# Altium PCB bms_afe_tester-1_1.PcbDoc (part 1 of 6)
Units mm, origin at the board's own origin, x right, y up, seen from the top; angles counter-clockwise.
Board outline 410 x 67 mm, 4 copper layers (L1, L2, L3, L4), stack 1.586 mm thick; 598 components, 356 nets, 1901 pads, 1542 vias.
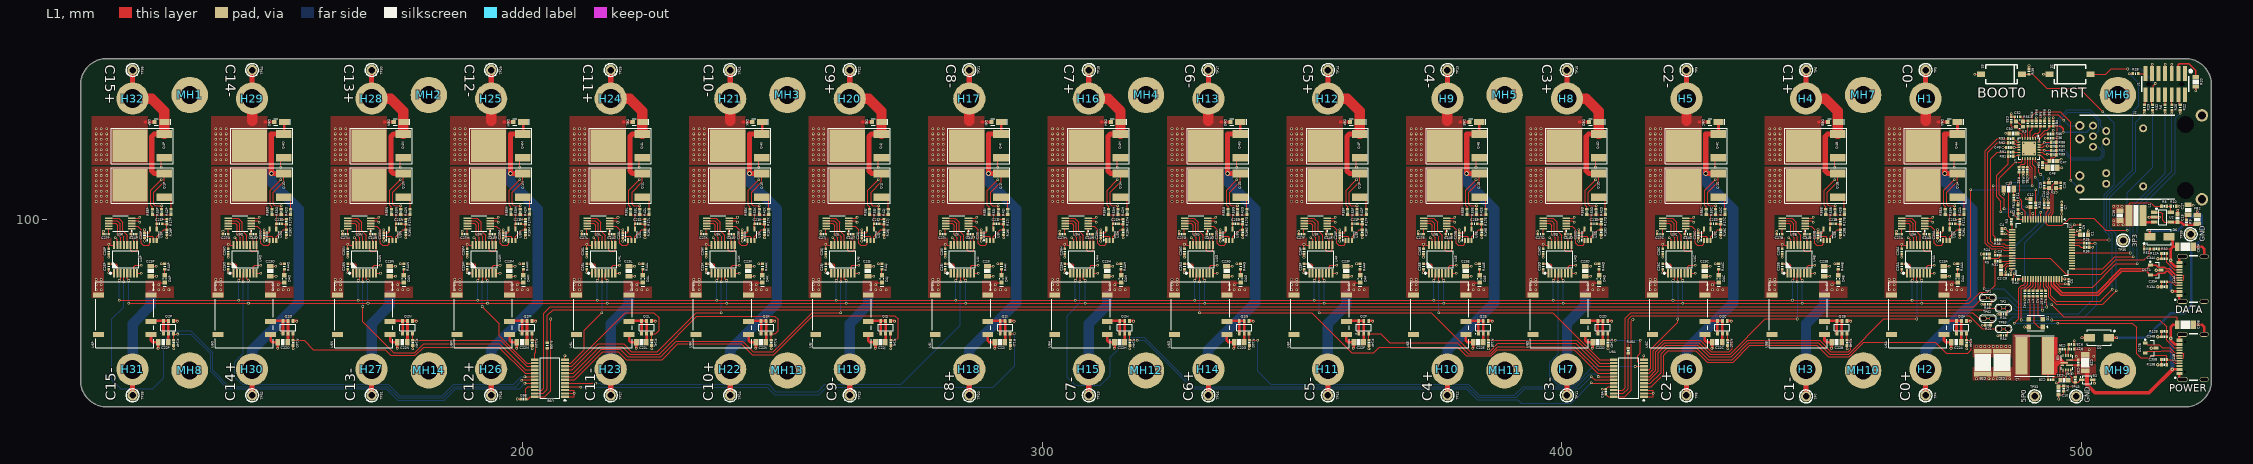
[diagram p0: L1 view]
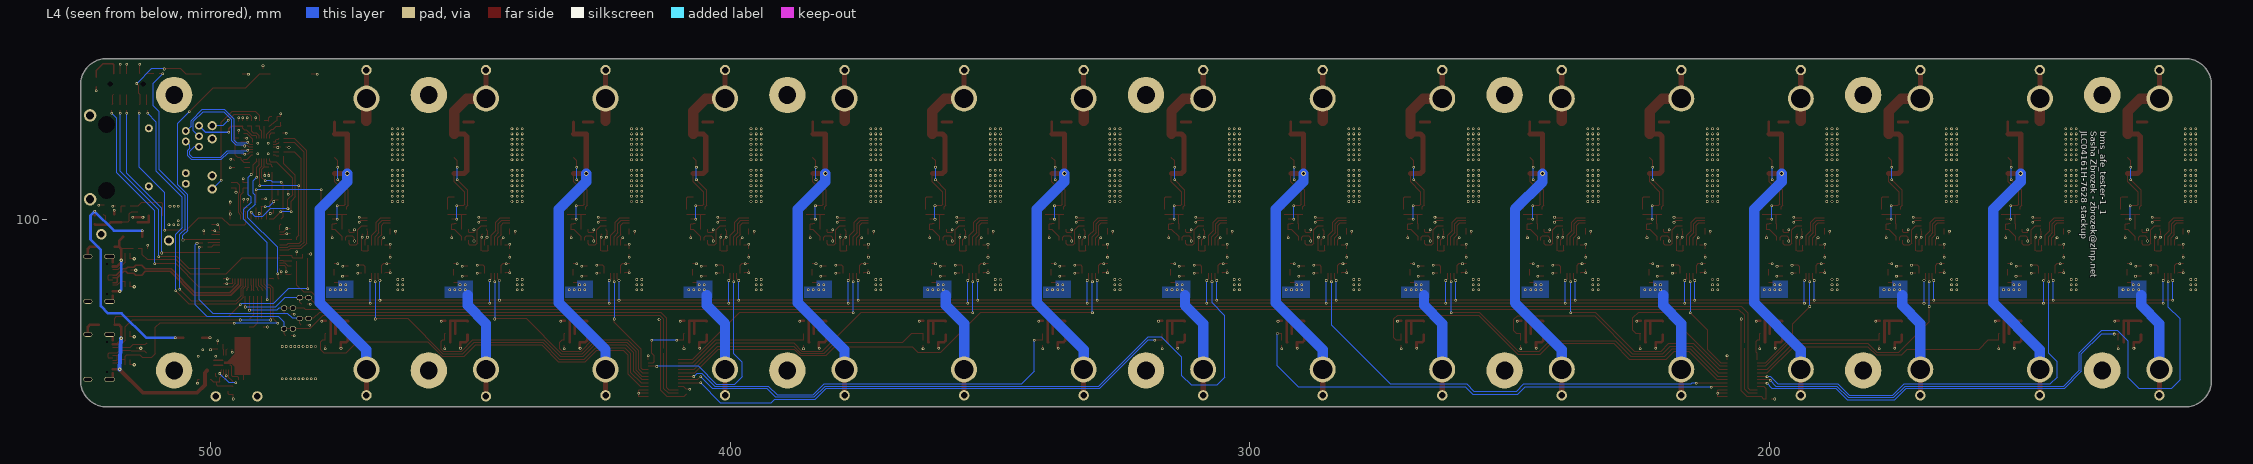
[diagram p1: L4 view, seen from below]
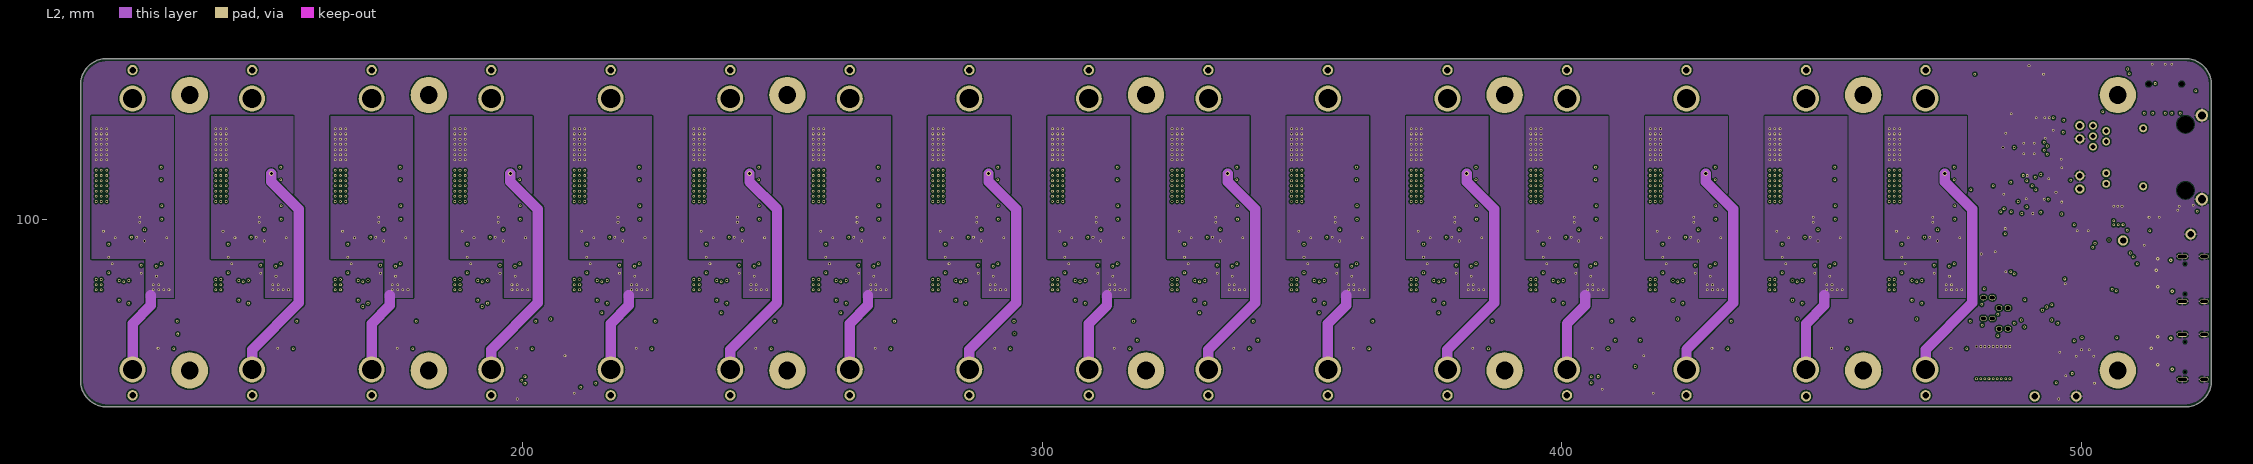
[diagram p2: L2]
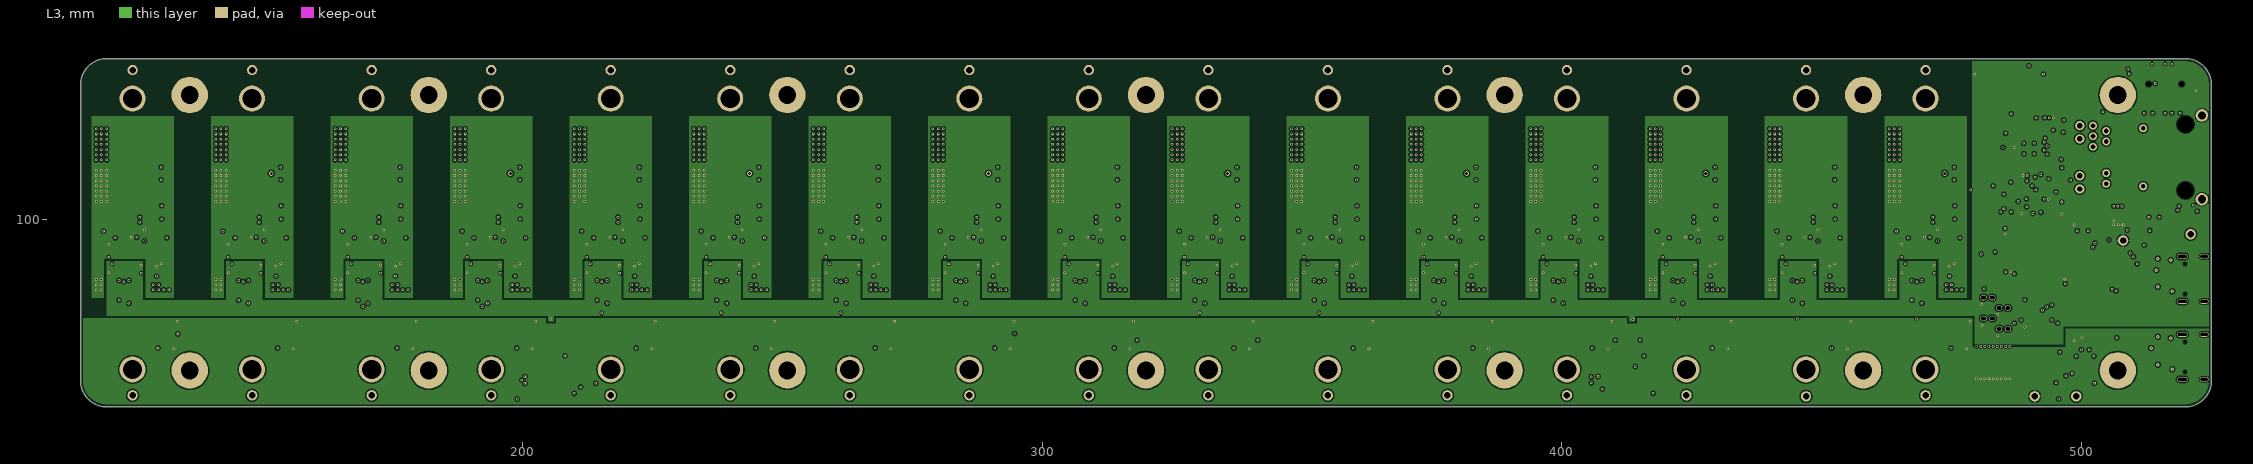
[diagram p3: L3]

## Layer stack, top to bottom
Top Solder: solder mask 0.0102, Solder Resist, Dk 3.5
L1: signal copper 0.035
D1: prepreg 0.2104, PP-006, Dk 4.1
L2: signal copper 0.0152
D2: core 1.065, FR-4, Dk 4.8
L3: signal copper 0.0152
D3: prepreg 0.2104, PP-006, Dk 4.1
L4: signal copper 0.035
Bottom Solder: solder mask 0.0102, Solder Resist, Dk 3.5

## Board outline
115,69 115,126 cw(c120,126) 120,131 520,131 cw(c520,126) 525,126 525,69 cw(c520,69) 520,64 120,64 cw(c120,69)

## Design rules (kind name [scope] priority, off if disabled: settings)
AcuteAngle [All] p1: minimum=7.00000000000000E+0001 checktracksonly=FALSE
AssemblyTestPointUsage [All] p1: valid=2
BoardOutlineClearance [All] p1: gap=0.5 ignorepadtopadclearanceinfootprint=FALSE except(0: Arc-SplitContinuation Track-SplitContinuation SMDPad-SplitContinuation THPad-SplitContinuation Via-SplitContinuation Fill-SplitContinuation Poly-SplitContinuation Region-SplitContinuation Text-SplitContinuation)
Clearance [All] p1: gap=0.152 ignorepadtopadclearanceinfootprint=TRUE except(0.254: Arc-Poly Track-Poly SMDPad-Poly THPad-Poly Via-Poly Fill-Fill Fill-Poly Poly-Poly)
ComponentClearance [All] p1 off: gap=0.254 collisioncheckmode=3 verticalgap=0.254 showdistances=FALSE
DiffPairsRouting DE_100 [InDifferentialPairClass('DE_100')] p1: maxlimit=0.2 minlimit=0.2 mostfreqgap=0.2 toplayer_minwidth=0.218 toplayer_maxwidth=0.218 toplayer_prefwidth=0.218 midlayer1_minwidth=0.218 midlayer1_maxwidth=0.218 midlayer1_prefwidth=0.218 midlayer2_minwidth=0.218 midlayer2_maxwidth=0.218 midlayer2_prefwidth=0.218 bottomlayer_minwidth=0.218 bottomlayer_maxwidth=0.218 bottomlayer_prefwidth=0.218 maxuncoupledlength=12.7
DiffPairsRouting DE_90 [InDifferentialPairClass('DE_90')] p2: maxlimit=0.2 minlimit=0.2 mostfreqgap=0.2 toplayer_minwidth=0.2 toplayer_maxwidth=0.284 toplayer_prefwidth=0.284 midlayer1_minwidth=0.2 midlayer1_maxwidth=0.284 midlayer1_prefwidth=0.284 midlayer2_minwidth=0.2 midlayer2_maxwidth=0.284 midlayer2_prefwidth=0.284 bottomlayer_minwidth=0.2 bottomlayer_maxwidth=0.284 bottomlayer_prefwidth=0.284 maxuncoupledlength=12.7
FabricationTestPointUsage [All] p1: valid=2 allowmultiple=FALSE
Height [All] p1: minheight=0 maxheight=50.8 prefheight=12.7
HoleSize [All] p1: absolutevalues=TRUE maxlimit=50.8 minlimit=0.3 maxpercent=80.000 minpercent=20.000
HoleToHoleClearance [All] p1: gap=0.5 allowstackedmicrovias=TRUE
MinimumAnnularRing MinimumViaRing [IsVia] p1: minimumring=0.05
MinimumAnnularRing [All] p2: minimumring=0.15
MinimumSolderMaskSliver [All] p1: minsoldermaskwidth=0.001
PlaneClearance [All] p1: clearance=0.203
PlaneConnect [All] p1: pad.planeconnectstyle=Relief pad.reliefexpansion=0.508 pad.reliefentries=4 pad.reliefconductorwidth=0.381 pad.reliefairgap=0.254 via.planeconnectstyle=Direct via.reliefexpansion=0.508 via.reliefentries=4 via.reliefconductorwidth=0.254 via.reliefairgap=0.254
PolygonConnect [All] p1: thpad.connectstyle=Relief thpad.reliefconductorwidth=0.381 thpad.reliefentries=4 thpad.polygonreliefangle="90 Angle" thpad.airgapwidth=0.254 smdpad.connectstyle=Direct smdpad.reliefconductorwidth=0.254 smdpad.reliefentries=4 smdpad.polygonreliefangle="90 Angle" smdpad.airgapwidth=0.254 via.connectstyle=Direct via.reliefconductorwidth=0.254 via.reliefentries=4 via.polygonreliefangle="90 Angle" via.airgapwidth=0.254
RoutingVias [All] p1: holewidth=0.3 width=0.45 viastyle="Through Hole" minholewidth=0.3 minwidth=0.45 maxholewidth=25.4 maxwidth=25.4
SilkToSilkClearance [All] p1: silktosilkclearance=0.076
SilkToSolderMaskClearance SilkscreenOverComponentPads [IsPad] p1: minsilkscreentomaskgap=0.003 clearancetoexposedcopper=FALSE
SolderMaskExpansion Vias [IsVia] p1: expansion=0.05 istentingtop=FALSE soldermaskfromhole=TRUE
SolderMaskExpansion "Default expansion" [All] p2: expansion=0.05 istentingtop=FALSE
SupplyNets "Schematic Supply Nets_7" [InNet('VBUS')] p1: voltage=0.000
SupplyNets "Schematic Supply Nets_6" [InNet('5P0')] p2: voltage=0.000
SupplyNets "Schematic Supply Nets_5" [InNet('3P3')] p3: voltage=0.000
SupplyNets "Schematic Supply Nets_4" [InNet('GND')] p4: voltage=0.000
UnRoutedNet [All] p1: checkbadconnections=TRUE
Width SE_50 [InNetClass('SE_50')] p1: maxlimit=0.349 minlimit=0.152 preferedwidth=0.349
Width [All] p2: maxlimit=50.8 minlimit=0.152 preferedwidth=0.203
17 further rules are at their usual default settings.

## Classes and differential pairs
channel class gpio_pcal9535a_expander: expander0 expander1
component class mcu_stm32h563: C1 C2 C3 C4 C5 C7 C8 C9 C12 C13 C14 C15 C16 D1 FB1 J1 R1 R2 R3 R4 R5 R6 R7 R11 R20 R21 R22 R24 R26 R28 R29 R30 R31 R32 R33 R34 R35 R36 R37 R38 R39 R40 R41 R49 R52 R54 S2 S3 TP1 TP2 TP62 TP63 U1 X1
component class expander1: C6B R46B U9B
component class expander0: C6A R46A U9A
channel class cell_simulator: cell0 cell1 cell2 cell3 cell4 cell5 cell6 cell7 cell8 cell9 cell10 cell11 cell12 cell13 cell14 cell15
component class buck_3p3: C17 C18 C19 FB2 L1 R8 R9 R10 U2
channel class conn_usbc: conn_usbc_data conn_usbc_power
component class conn_usbc_data: C34A C35A C80A D17A J11A R12A R13A
component class cell11: C20L C21L C22L C23L C24L C25L C26L C27L D4L D8L Q1L Q2L Q4L R14L R17L R19L R42L R44L R53L R55L U3L U4L U5L U6L
component class cell5: C20F C21F C22F C23F C24F C25F C26F C27F D4F D8F Q1F Q2F Q4F R14F R17F R19F R42F R44F R53F R55F U3F U4F U5F U6F
component class cell4: C20E C21E C22E C23E C24E C25E C26E C27E D4E D8E Q1E Q2E Q4E R14E R17E R19E R42E R44E R53E R55E U3E U4E U5E U6E
differential pair class DE_100: RX TX
differential pair class DE_90: USB._1
component class buck_5p0: C10 C28 C29 C30 C31 C32 C33 C39 D5 L2 R15 R25 R27 R45 U8
component class cell15: C20P C21P C22P C23P C24P C25P C26P C27P D4P D8P Q1P Q2P Q4P R14P R17P R19P R42P R44P R53P R55P U3P U4P U5P U6P
component class cell13: C20N C21N C22N C23N C24N C25N C26N C27N D4N D8N Q1N Q2N Q4N R14N R17N R19N R42N R44N R53N R55N U3N U4N U5N U6N
component class cell14: C20O C21O C22O C23O C24O C25O C26O C27O D4O D8O Q1O Q2O Q4O R14O R17O R19O R42O R44O R53O R55O U3O U4O U5O U6O
component class cell12: C20M C21M C22M C23M C24M C25M C26M C27M D4M D8M Q1M Q2M Q4M R14M R17M R19M R42M R44M R53M R55M U3M U4M U5M U6M
component class cell8: C20I C21I C22I C23I C24I C25I C26I C27I D4I D8I Q1I Q2I Q4I R14I R17I R19I R42I R44I R53I R55I U3I U4I U5I U6I
component class cell10: C20K C21K C22K C23K C24K C25K C26K C27K D4K D8K Q1K Q2K Q4K R14K R17K R19K R42K R44K R53K R55K U3K U4K U5K U6K
component class cell9: C20J C21J C22J C23J C24J C25J C26J C27J D4J D8J Q1J Q2J Q4J R14J R17J R19J R42J R44J R53J R55J U3J U4J U5J U6J
component class cell7: C20H C21H C22H C23H C24H C25H C26H C27H D4H D8H Q1H Q2H Q4H R14H R17H R19H R42H R44H R53H R55H U3H U4H U5H U6H
component class cell6: C20G C21G C22G C23G C24G C25G C26G C27G D4G D8G Q1G Q2G Q4G R14G R17G R19G R42G R44G R53G R55G U3G U4G U5G U6G
component class cell3: C20D C21D C22D C23D C24D C25D C26D C27D D4D D8D Q1D Q2D Q4D R14D R17D R19D R42D R44D R53D R55D U3D U4D U5D U6D
component class cell2: C20C C21C C22C C23C C24C C25C C26C C27C D4C D8C Q1C Q2C Q4C R14C R17C R19C R42C R44C R53C R55C U3C U4C U5C U6C
component class cell1: C20B C21B C22B C23B C24B C25B C26B C27B D4B D8B Q1B Q2B Q4B R14B R17B R19B R42B R44B R53B R55B U3B U4B U5B U6B
component class cell0: C20A C21A C22A C23A C24A C25A C26A C27A D4A D8A Q1A Q2A Q4A R14A R17A R19A R42A R44A R53A R55A U3A U4A U5A U6A
component class ethernet_phy: C36 C47 C48 C49 C50 C51 C52 C53 C56 FB3 J2 R56 R81 R82 R83 R84 R86 R87 R88 R89 R90 R91 R92 R93 R95 R96 R97 R98 U7 X3
component class conn_usbc_power: C34B C35B C80B D17B J11B R12B R13B
component class top: D2 D6 H1 H2 H3 H4 H5 H6 H7 H8 H9 H10 H11 H12 H13 H14 H15 H16 H17 H18 H19 H20 H21 H22 H23 H24 H25 H26 H27 H28 H29 H30 H31 H32 MH1 MH2 MH3 MH4 MH5 MH6 MH7 MH8 MH9 MH10 MH11 MH12 MH13 MH14 R50 R51 TP4 TP5 TP6 TP7 TP8 TP9 TP10 TP11 TP12 TP13 TP14 TP15 TP16 TP17 TP18 TP19 TP20 TP21 TP22 TP23 TP24 TP25 TP26 TP27 TP28 TP29 TP30 TP31 TP32 TP33 TP34 TP35 TP36 TP38 TP39 TP43 uuc
differential pair USB._1: +USB._1_P -USB._1_N
differential pair TX: +TX_P -TX_N
differential pair RX: +RX_P -RX_N

## Components (designator, comment, footprint, x,y, rotation, side; value= is the part's Value field where it differs from the comment)
C1 "GCM188R70J225KE22D" C0603 500.5,97.1 r0 top
C2 "GCM188R70J225KE22D" C0603 484.5,90.3 r270 top
C3 "CL05B104KB54PNC" C0402 483.9,93.2 r180 top
C4 "CL05B104KB54PNC" C0402 484.7,97.8 r90 top
C5 "CL05B104KB54PNC" C0402 497.525,88.075 r270 top
C6A "CL05B104KB54PNC" C0402 408.5,66.9 r90 top (schematic designator C6)
C6B "CL05B104KB54PNC" C0402 200.2,65.5 r180 top (schematic designator C6)
C7 "CL05B104KB54PNC" C0402 496.2,102.3 r90 top
C8 "CL05B104KB54PNC" C0402 485.9,89.4 r180 top
C9 "CL05B104KB54PNC" C0402 499.8,98.5 r270 top
C10 "CL10B105KA8NNNC" C0603 495.6,67.1 r270 top
C12 "CL10B105KA8NNNC" C0603 490.2,103.2 r90 top
C13 "CC0805KKX7R5BB106" C0805 486,105.9 r180 top
C14 "CC0402JRNPO9BN270" C0402 492.8,102.8 r90 top
C15 "CC0402CRNPO9BN6R0" C0402 492.8,106.6 r90 top
C16 "CC0402CRNPO9BN6R0" C0402 496,106.6 r270 top
C17 "CL21B106KOQNNNE" C0805 520.5,101.9 r90 top
C18 "CL10B105KA8NNNC" C0603 518.5,100.3 r90 top
C19 "CL21B106KOQNNNE" C0805 507.4,100.8 r90 top
C20A "CL05B104KB54PNC" C0402 472.3,97 r270 top (schematic designator C20)
C20B "CL05B104KB54PNC" C0402 449.3,97 r270 top (schematic designator C20)
C20C "CL05B104KB54PNC" C0402 426.3,97 r270 top (schematic designator C20)
C20D "CL05B104KB54PNC" C0402 403.3,97 r270 top (schematic designator C20)
C20E "CL05B104KB54PNC" C0402 380.3,97 r270 top (schematic designator C20)
C20F "CL05B104KB54PNC" C0402 357.3,97 r270 top (schematic designator C20)
C20G "CL05B104KB54PNC" C0402 334.3,97 r270 top (schematic designator C20)
C20H "CL05B104KB54PNC" C0402 311.3,97 r270 top (schematic designator C20)
C20I "CL05B104KB54PNC" C0402 288.3,97 r270 top (schematic designator C20)
C20J "CL05B104KB54PNC" C0402 265.3,97 r270 top (schematic designator C20)
C20K "CL05B104KB54PNC" C0402 242.3,97 r270 top (schematic designator C20)
C20L "CL05B104KB54PNC" C0402 219.3,97 r270 top (schematic designator C20)
C20M "CL05B104KB54PNC" C0402 196.3,97 r270 top (schematic designator C20)
C20N "CL05B104KB54PNC" C0402 173.3,97 r270 top (schematic designator C20)
C20O "CL05B104KB54PNC" C0402 150.3,97 r270 top (schematic designator C20)
C20P "CL05B104KB54PNC" C0402 127.3,97 r270 top (schematic designator C20)
C21A "CBR04C680F3GAC" C0402 475.2,99.2 r0 top (schematic designator C21)
C21B "CBR04C680F3GAC" C0402 452.2,99.2 r0 top (schematic designator C21)
C21C "CBR04C680F3GAC" C0402 429.2,99.2 r0 top (schematic designator C21)
C21D "CBR04C680F3GAC" C0402 406.2,99.2 r0 top (schematic designator C21)
C21E "CBR04C680F3GAC" C0402 383.2,99.2 r0 top (schematic designator C21)
C21F "CBR04C680F3GAC" C0402 360.2,99.2 r0 top (schematic designator C21)
C21G "CBR04C680F3GAC" C0402 337.2,99.2 r0 top (schematic designator C21)
C21H "CBR04C680F3GAC" C0402 314.2,99.2 r0 top (schematic designator C21)
C21I "CBR04C680F3GAC" C0402 291.2,99.2 r0 top (schematic designator C21)
C21J "CBR04C680F3GAC" C0402 268.2,99.2 r0 top (schematic designator C21)
C21K "CBR04C680F3GAC" C0402 245.2,99.2 r0 top (schematic designator C21)
C21L "CBR04C680F3GAC" C0402 222.2,99.2 r0 top (schematic designator C21)
C21M "CBR04C680F3GAC" C0402 199.2,99.2 r0 top (schematic designator C21)
C21N "CBR04C680F3GAC" C0402 176.2,99.2 r0 top (schematic designator C21)
C21O "CBR04C680F3GAC" C0402 153.2,99.2 r0 top (schematic designator C21)
C21P "CBR04C680F3GAC" C0402 130.2,99.2 r0 top (schematic designator C21)
C22A "CL21B106KOQNNNE" C0805 475.9,76.4 r180 top (schematic designator C22)
C22B "CL21B106KOQNNNE" C0805 452.9,76.4 r180 top (schematic designator C22)
C22C "CL21B106KOQNNNE" C0805 429.9,76.4 r180 top (schematic designator C22)
C22D "CL21B106KOQNNNE" C0805 406.9,76.4 r180 top (schematic designator C22)
C22E "CL21B106KOQNNNE" C0805 383.9,76.4 r180 top (schematic designator C22)
C22F "CL21B106KOQNNNE" C0805 360.9,76.4 r180 top (schematic designator C22)
C22G "CL21B106KOQNNNE" C0805 337.9,76.4 r180 top (schematic designator C22)
C22H "CL21B106KOQNNNE" C0805 314.9,76.4 r180 top (schematic designator C22)
C22I "CL21B106KOQNNNE" C0805 291.9,76.4 r180 top (schematic designator C22)
C22J "CL21B106KOQNNNE" C0805 268.9,76.4 r180 top (schematic designator C22)
C22K "CL21B106KOQNNNE" C0805 245.9,76.4 r180 top (schematic designator C22)
C22L "CL21B106KOQNNNE" C0805 222.9,76.4 r180 top (schematic designator C22)
C22M "CL21B106KOQNNNE" C0805 199.9,76.4 r180 top (schematic designator C22)
C22N "CL21B106KOQNNNE" C0805 176.9,76.4 r180 top (schematic designator C22)
C22O "CL21B106KOQNNNE" C0805 153.9,76.4 r180 top (schematic designator C22)
C22P "CL21B106KOQNNNE" C0805 130.9,76.4 r180 top (schematic designator C22)
C23A "CL21B106KOQNNNE" C0805 473.5,90.1 r270 top (schematic designator C23)
C23B "CL21B106KOQNNNE" C0805 450.5,90.1 r270 top (schematic designator C23)
C23C "CL21B106KOQNNNE" C0805 427.5,90.1 r270 top (schematic designator C23)
C23D "CL21B106KOQNNNE" C0805 404.5,90.1 r270 top (schematic designator C23)
C23E "CL21B106KOQNNNE" C0805 381.5,90.1 r270 top (schematic designator C23)
C23F "CL21B106KOQNNNE" C0805 358.5,90.1 r270 top (schematic designator C23)
C23G "CL21B106KOQNNNE" C0805 335.5,90.1 r270 top (schematic designator C23)
C23H "CL21B106KOQNNNE" C0805 312.5,90.1 r270 top (schematic designator C23)
C23I "CL21B106KOQNNNE" C0805 289.5,90.1 r270 top (schematic designator C23)
C23J "CL21B106KOQNNNE" C0805 266.5,90.1 r270 top (schematic designator C23)
C23K "CL21B106KOQNNNE" C0805 243.5,90.1 r270 top (schematic designator C23)
C23L "CL21B106KOQNNNE" C0805 220.5,90.1 r270 top (schematic designator C23)
C23M "CL21B106KOQNNNE" C0805 197.5,90.1 r270 top (schematic designator C23)
C23N "CL21B106KOQNNNE" C0805 174.5,90.1 r270 top (schematic designator C23)
C23O "CL21B106KOQNNNE" C0805 151.5,90.1 r270 top (schematic designator C23)
C23P "CL21B106KOQNNNE" C0805 128.5,90.1 r270 top (schematic designator C23)
C24A "CL05B104KB54PNC" C0402 470.2,97.2 r0 top (schematic designator C24)
C24B "CL05B104KB54PNC" C0402 447.2,97.2 r0 top (schematic designator C24)
C24C "CL05B104KB54PNC" C0402 424.2,97.2 r0 top (schematic designator C24)
C24D "CL05B104KB54PNC" C0402 401.2,97.2 r0 top (schematic designator C24)
C24E "CL05B104KB54PNC" C0402 378.2,97.2 r0 top (schematic designator C24)
C24F "CL05B104KB54PNC" C0402 355.2,97.2 r0 top (schematic designator C24)
C24G "CL05B104KB54PNC" C0402 332.2,97.2 r0 top (schematic designator C24)
C24H "CL05B104KB54PNC" C0402 309.2,97.2 r0 top (schematic designator C24)
C24I "CL05B104KB54PNC" C0402 286.2,97.2 r0 top (schematic designator C24)
C24J "CL05B104KB54PNC" C0402 263.2,97.2 r0 top (schematic designator C24)
C24K "CL05B104KB54PNC" C0402 240.2,97.2 r0 top (schematic designator C24)
C24L "CL05B104KB54PNC" C0402 217.2,97.2 r0 top (schematic designator C24)
C24M "CL05B104KB54PNC" C0402 194.2,97.2 r0 top (schematic designator C24)
C24N "CL05B104KB54PNC" C0402 171.2,97.2 r0 top (schematic designator C24)
C24O "CL05B104KB54PNC" C0402 148.2,97.2 r0 top (schematic designator C24)
C24P "CL05B104KB54PNC" C0402 125.2,97.2 r0 top (schematic designator C24)
C25A "CL05B104KB54PNC" C0402 465.4,91 r90 top (schematic designator C25)
C25B "CL05B104KB54PNC" C0402 442.4,91 r90 top (schematic designator C25)
C25C "CL05B104KB54PNC" C0402 419.4,91 r90 top (schematic designator C25)
C25D "CL05B104KB54PNC" C0402 396.4,91 r90 top (schematic designator C25)
C25E "CL05B104KB54PNC" C0402 373.4,91 r90 top (schematic designator C25)
C25F "CL05B104KB54PNC" C0402 350.4,91 r90 top (schematic designator C25)
C25G "CL05B104KB54PNC" C0402 327.4,91 r90 top (schematic designator C25)
C25H "CL05B104KB54PNC" C0402 304.4,91 r90 top (schematic designator C25)
C25I "CL05B104KB54PNC" C0402 281.4,91 r90 top (schematic designator C25)
C25J "CL05B104KB54PNC" C0402 258.4,91 r90 top (schematic designator C25)
C25K "CL05B104KB54PNC" C0402 235.4,91 r90 top (schematic designator C25)
C25L "CL05B104KB54PNC" C0402 212.4,91 r90 top (schematic designator C25)
C25M "CL05B104KB54PNC" C0402 189.4,91 r90 top (schematic designator C25)
C25N "CL05B104KB54PNC" C0402 166.4,91 r90 top (schematic designator C25)
C25O "CL05B104KB54PNC" C0402 143.4,91 r90 top (schematic designator C25)
C25P "CL05B104KB54PNC" C0402 120.4,91 r90 top (schematic designator C25)
C26A "CL05B104KB54PNC" C0402 465.4,93.9 r270 top (schematic designator C26)
C26B "CL05B104KB54PNC" C0402 442.4,93.9 r270 top (schematic designator C26)
C26C "CL05B104KB54PNC" C0402 419.4,93.9 r270 top (schematic designator C26)
C26D "CL05B104KB54PNC" C0402 396.4,93.9 r270 top (schematic designator C26)
C26E "CL05B104KB54PNC" C0402 373.4,93.9 r270 top (schematic designator C26)
C26F "CL05B104KB54PNC" C0402 350.4,93.9 r270 top (schematic designator C26)
C26G "CL05B104KB54PNC" C0402 327.4,93.9 r270 top (schematic designator C26)
C26H "CL05B104KB54PNC" C0402 304.4,93.9 r270 top (schematic designator C26)
C26I "CL05B104KB54PNC" C0402 281.4,93.9 r270 top (schematic designator C26)
C26J "CL05B104KB54PNC" C0402 258.4,93.9 r270 top (schematic designator C26)
C26K "CL05B104KB54PNC" C0402 235.4,93.9 r270 top (schematic designator C26)
C26L "CL05B104KB54PNC" C0402 212.4,93.9 r270 top (schematic designator C26)
C26M "CL05B104KB54PNC" C0402 189.4,93.9 r270 top (schematic designator C26)
C26N "CL05B104KB54PNC" C0402 166.4,93.9 r270 top (schematic designator C26)
C26O "CL05B104KB54PNC" C0402 143.4,93.9 r270 top (schematic designator C26)
C26P "CL05B104KB54PNC" C0402 120.4,93.9 r270 top (schematic designator C26)
C27A "CL05B104KB54PNC" C0402 464.9,97.2 r180 top (schematic designator C27)
C27B "CL05B104KB54PNC" C0402 441.9,97.2 r180 top (schematic designator C27)
C27C "CL05B104KB54PNC" C0402 418.9,97.2 r180 top (schematic designator C27)
C27D "CL05B104KB54PNC" C0402 395.9,97.2 r180 top (schematic designator C27)
C27E "CL05B104KB54PNC" C0402 372.9,97.2 r180 top (schematic designator C27)
C27F "CL05B104KB54PNC" C0402 349.9,97.2 r180 top (schematic designator C27)
C27G "CL05B104KB54PNC" C0402 326.9,97.2 r180 top (schematic designator C27)
C27H "CL05B104KB54PNC" C0402 303.9,97.2 r180 top (schematic designator C27)
C27I "CL05B104KB54PNC" C0402 280.9,97.2 r180 top (schematic designator C27)
C27J "CL05B104KB54PNC" C0402 257.9,97.2 r180 top (schematic designator C27)
C27K "CL05B104KB54PNC" C0402 234.9,97.2 r180 top (schematic designator C27)
C27L "CL05B104KB54PNC" C0402 211.9,97.2 r180 top (schematic designator C27)
C27M "CL05B104KB54PNC" C0402 188.9,97.2 r180 top (schematic designator C27)
C27N "CL05B104KB54PNC" C0402 165.9,97.2 r180 top (schematic designator C27)
C27O "CL05B104KB54PNC" C0402 142.9,97.2 r180 top (schematic designator C27)
C27P "CL05B104KB54PNC" C0402 119.9,97.2 r180 top (schematic designator C27)
C28 "CL05B104KB54PNC" C0402 494.1,69.2 r180 top
C29 "CL31B106KBHNNNE" C1206 500.7,72.5 r90 top
C30 "CL05B104KB54PNC" C0402 499.4,72.5 r90 top
C31 "CL10B105KA8NNNC" C0603 496.7,69.1 r0 top
C32 "C4532X7R1C336MT000N" C1812 484.7,72.5 r90 top
C33 "C4532X7R1C336MT000N" C1812 481,72.5 r90 top
C34A "CL05C331JB5NNNC" C0402 515.9,92.5 r180 top (schematic designator C34)
C34B "CL05C331JB5NNNC" C0402 515.9,77.5 r180 top (schematic designator C34)
C35A "CL05C331JB5NNNC" C0402 515.9,88.1 r180 top (schematic designator C35)
C35B "CL05C331JB5NNNC" C0402 515.9,73.1 r180 top (schematic designator C35)
C36 "CL05B104KB54PNC" C0402 494.1,115.7 r180 top
C39 "CL05B104KB54PNC" C0402 496.3,75.1 r180 top
C47 "CL10B105KA8NNNC" C0603 494.6,111.3 r0 top
C48 "CC0805KKX7R5BB106" C0805 494.4,110 r0 top
C49 "CL05B104KB54PNC" C0402 486,113.9 r180 top
C50 "CL10B105KA8NNNC" C0603 486.9,116.6 r180 top
C51 "CC0402JRNPO9BN270" C0402 489.6,109.6 r270 top
C52 "CL05C100JB5NNNC" C0402 487.7,119.8 r180 top
C53 "CL05C100JB5NNNC" C0402 486.5,119.3 r90 top
C56 "CL05B104KB54PNC" C0402 493.8,118.5 r90 top
C80A "CL31B106KBHNNNE" C1206 520,94.8 r0 top (schematic designator C80)
C80B "CL31B106KBHNNNE" C1206 520,79.8 r0 top (schematic designator C80)
D1 "XL-3528RGBW-HM" LED_RGB_SMD3528-4P 491.2,80.1 r0 top
D2 "B340A-13-F" SMA 503.4,77.3 r0 top
D4A "LTST-C190GKT" LED_0603P_GREEN 476.2,88.6 r90 top (schematic designator D4)
D4B "LTST-C190GKT" LED_0603P_GREEN 453.2,88.6 r90 top (schematic designator D4)
D4C "LTST-C190GKT" LED_0603P_GREEN 430.2,88.6 r90 top (schematic designator D4)
D4D "LTST-C190GKT" LED_0603P_GREEN 407.2,88.6 r90 top (schematic designator D4)
D4E "LTST-C190GKT" LED_0603P_GREEN 384.2,88.6 r90 top (schematic designator D4)
D4F "LTST-C190GKT" LED_0603P_GREEN 361.2,88.6 r90 top (schematic designator D4)
D4G "LTST-C190GKT" LED_0603P_GREEN 338.2,88.6 r90 top (schematic designator D4)
D4H "LTST-C190GKT" LED_0603P_GREEN 315.2,88.6 r90 top (schematic designator D4)
D4I "LTST-C190GKT" LED_0603P_GREEN 292.2,88.6 r90 top (schematic designator D4)
D4J "LTST-C190GKT" LED_0603P_GREEN 269.2,88.6 r90 top (schematic designator D4)
D4K "LTST-C190GKT" LED_0603P_GREEN 246.2,88.6 r90 top (schematic designator D4)
D4L "LTST-C190GKT" LED_0603P_GREEN 223.2,88.6 r90 top (schematic designator D4)
D4M "LTST-C190GKT" LED_0603P_GREEN 200.2,88.6 r90 top (schematic designator D4)
D4N "LTST-C190GKT" LED_0603P_GREEN 177.2,88.6 r90 top (schematic designator D4)
D4O "LTST-C190GKT" LED_0603P_GREEN 154.2,88.6 r90 top (schematic designator D4)
D4P "LTST-C190GKT" LED_0603P_GREEN 131.2,88.6 r90 top (schematic designator D4)
D5 "SZMM3Z5V1ST1G" SOD323 501.1,69.2 r0 top
D6 "B340A-13-F" SMA 515,96.7 r180 top
D8A "MSS2P2-M3/89A" ESMP 474.9,118.8 r180 top (schematic designator D8)
D8B "MSS2P2-M3/89A" ESMP 451.9,118.8 r180 top (schematic designator D8)
D8C "MSS2P2-M3/89A" ESMP 428.9,118.8 r180 top (schematic designator D8)
D8D "MSS2P2-M3/89A" ESMP 405.9,118.8 r180 top (schematic designator D8)
D8E "MSS2P2-M3/89A" ESMP 382.9,118.8 r180 top (schematic designator D8)
D8F "MSS2P2-M3/89A" ESMP 359.9,118.8 r180 top (schematic designator D8)
D8G "MSS2P2-M3/89A" ESMP 336.9,118.8 r180 top (schematic designator D8)
D8H "MSS2P2-M3/89A" ESMP 313.9,118.8 r180 top (schematic designator D8)
D8I "MSS2P2-M3/89A" ESMP 290.9,118.8 r180 top (schematic designator D8)
D8J "MSS2P2-M3/89A" ESMP 267.9,118.8 r180 top (schematic designator D8)
D8K "MSS2P2-M3/89A" ESMP 244.9,118.8 r180 top (schematic designator D8)
D8L "MSS2P2-M3/89A" ESMP 221.9,118.8 r180 top (schematic designator D8)
D8M "MSS2P2-M3/89A" ESMP 198.9,118.8 r180 top (schematic designator D8)
D8N "MSS2P2-M3/89A" ESMP 175.9,118.8 r180 top (schematic designator D8)
D8O "MSS2P2-M3/89A" ESMP 152.9,118.8 r180 top (schematic designator D8)
D8P "MSS2P2-M3/89A" ESMP 129.9,118.8 r180 top (schematic designator D8)
D17A "PESD2USB3UX" 3SOT23 514.3,90.3 r0 top (schematic designator D17)
D17B "PESD2USB3UX" 3SOT23 513.3,75.3 r0 top (schematic designator D17)
FB1 "BLM15PX601SN1D" FB0402 487.8,102.4 r270 top
FB2 "MPZ2012S102AT000" FB0805 522.3,100 r270 top
FB3 "BLM15PX601SN1D" FB0402 494.6,118.5 r270 top
H1 "SMTSO20100CTJ" SINHOO_SMTSO20100CTJ 470,123.3 r0 top
H2 "SMTSO20100CTJ" SINHOO_SMTSO20100CTJ 470,71.2 r0 top
H3 "SMTSO20100CTJ" SINHOO_SMTSO20100CTJ 447,71.2 r0 top
H4 "SMTSO20100CTJ" SINHOO_SMTSO20100CTJ 447,123.3 r0 top
H5 "SMTSO20100CTJ" SINHOO_SMTSO20100CTJ 424,123.3 r0 top
H6 "SMTSO20100CTJ" SINHOO_SMTSO20100CTJ 424,71.2 r0 top
H7 "SMTSO20100CTJ" SINHOO_SMTSO20100CTJ 401,71.2 r0 top
H8 "SMTSO20100CTJ" SINHOO_SMTSO20100CTJ 401,123.3 r0 top
H9 "SMTSO20100CTJ" SINHOO_SMTSO20100CTJ 378,123.3 r0 top
H10 "SMTSO20100CTJ" SINHOO_SMTSO20100CTJ 378,71.2 r0 top
H11 "SMTSO20100CTJ" SINHOO_SMTSO20100CTJ 355,71.2 r0 top
H12 "SMTSO20100CTJ" SINHOO_SMTSO20100CTJ 355,123.3 r0 top
H13 "SMTSO20100CTJ" SINHOO_SMTSO20100CTJ 332,123.3 r0 top
H14 "SMTSO20100CTJ" SINHOO_SMTSO20100CTJ 332,71.2 r0 top
H15 "SMTSO20100CTJ" SINHOO_SMTSO20100CTJ 309,71.2 r0 top
H16 "SMTSO20100CTJ" SINHOO_SMTSO20100CTJ 309,123.3 r0 top
H17 "SMTSO20100CTJ" SINHOO_SMTSO20100CTJ 286,123.3 r0 top
H18 "SMTSO20100CTJ" SINHOO_SMTSO20100CTJ 286,71.2 r0 top
H19 "SMTSO20100CTJ" SINHOO_SMTSO20100CTJ 263,71.2 r0 top
H20 "SMTSO20100CTJ" SINHOO_SMTSO20100CTJ 263,123.3 r0 top
H21 "SMTSO20100CTJ" SINHOO_SMTSO20100CTJ 240,123.3 r0 top
H22 "SMTSO20100CTJ" SINHOO_SMTSO20100CTJ 240,71.2 r0 top
H23 "SMTSO20100CTJ" SINHOO_SMTSO20100CTJ 217,71.2 r0 top
H24 "SMTSO20100CTJ" SINHOO_SMTSO20100CTJ 217,123.3 r0 top
H25 "SMTSO20100CTJ" SINHOO_SMTSO20100CTJ 194,123.3 r0 top
H26 "SMTSO20100CTJ" SINHOO_SMTSO20100CTJ 194,71.2 r0 top
H27 "SMTSO20100CTJ" SINHOO_SMTSO20100CTJ 171,71.2 r0 top
H28 "SMTSO20100CTJ" SINHOO_SMTSO20100CTJ 171,123.3 r0 top
H29 "SMTSO20100CTJ" SINHOO_SMTSO20100CTJ 148,123.3 r0 top
H30 "SMTSO20100CTJ" SINHOO_SMTSO20100CTJ 148,71.2 r0 top
H31 "SMTSO20100CTJ" SINHOO_SMTSO20100CTJ 125,71.2 r0 top
H32 "SMTSO20100CTJ" SINHOO_SMTSO20100CTJ 125,123.3 r0 top
J1 "FTSH-107-01-L-DV-K-A" SAMTEC_FTSH-107-01-L-DV-K-A 516.1,126.1 r180 top
J2 "0826-1L1T-57-F" BELFUSE_0826-1L1T-57-F 520,112 r270 top
J11A "TYPE-C-31-M-12" CONN_USBC_TYPE-C-31-M-12 525.71,88.6 r90 top (schematic designator J11)
J11B "TYPE-C-31-M-12" CONN_USBC_TYPE-C-31-M-12 525.71,73.6 r90 top (schematic designator J11)
L1 "FTC404020S4R7MGCA" SMD-4.1x4.1x2.0 510.5,100.8 r180 top
L2 "SRP7030CA-2R2M" BOURNS_SRP7030CA 491,73.8 r180 top
MH1 "HOLE_M3" HOLE_M3 136,124 r0 top
MH2 "HOLE_M3" HOLE_M3 182,124 r0 top
MH3 "HOLE_M3" HOLE_M3 251,124 r0 top
MH4 "HOLE_M3" HOLE_M3 320,124 r0 top
MH5 "HOLE_M3" HOLE_M3 389,124 r0 top
MH6 "HOLE_M3" HOLE_M3 507,124 r0 top
MH7 "HOLE_M3" HOLE_M3 458,124 r0 top
MH8 "HOLE_M3" HOLE_M3 136,71 r0 top
MH9 "HOLE_M3" HOLE_M3 507,71 r0 top
MH10 "HOLE_M3" HOLE_M3 458,71 r0 top
MH11 "HOLE_M3" HOLE_M3 389,71 r0 top
MH12 "HOLE_M3" HOLE_M3 320,71 r0 top
MH13 "HOLE_M3" HOLE_M3 251,71 r0 top
MH14 "HOLE_M3" HOLE_M3 182,71 r0 top
Q1A "2SCR572D3TL1" TO-252-3 469.5,106.6 r90 top (schematic designator Q1)
Q1B "2SCR572D3TL1" TO-252-3 446.5,106.6 r90 top (schematic designator Q1)
Q1C "2SCR572D3TL1" TO-252-3 423.5,106.6 r90 top (schematic designator Q1)
Q1D "2SCR572D3TL1" TO-252-3 400.5,106.6 r90 top (schematic designator Q1)
Q1E "2SCR572D3TL1" TO-252-3 377.5,106.6 r90 top (schematic designator Q1)
Q1F "2SCR572D3TL1" TO-252-3 354.5,106.6 r90 top (schematic designator Q1)
Q1G "2SCR572D3TL1" TO-252-3 331.5,106.6 r90 top (schematic designator Q1)
Q1H "2SCR572D3TL1" TO-252-3 308.5,106.6 r90 top (schematic designator Q1)
Q1I "2SCR572D3TL1" TO-252-3 285.5,106.6 r90 top (schematic designator Q1)
Q1J "2SCR572D3TL1" TO-252-3 262.5,106.6 r90 top (schematic designator Q1)
Q1K "2SCR572D3TL1" TO-252-3 239.5,106.6 r90 top (schematic designator Q1)
Q1L "2SCR572D3TL1" TO-252-3 216.5,106.6 r90 top (schematic designator Q1)
Q1M "2SCR572D3TL1" TO-252-3 193.5,106.6 r90 top (schematic designator Q1)
Q1N "2SCR572D3TL1" TO-252-3 170.5,106.6 r90 top (schematic designator Q1)
Q1O "2SCR572D3TL1" TO-252-3 147.5,106.6 r90 top (schematic designator Q1)
Q1P "2SCR572D3TL1" TO-252-3 124.5,106.6 r90 top (schematic designator Q1)
Q2A "FDC638P" 6SOT23 476.9,79.3 r90 top (schematic designator Q2)
Q2B "FDC638P" 6SOT23 453.9,79.3 r90 top (schematic designator Q2)
Q2C "FDC638P" 6SOT23 430.9,79.3 r90 top (schematic designator Q2)
Q2D "FDC638P" 6SOT23 407.9,79.3 r90 top (schematic designator Q2)
Q2E "FDC638P" 6SOT23 384.9,79.3 r90 top (schematic designator Q2)
Q2F "FDC638P" 6SOT23 361.9,79.3 r90 top (schematic designator Q2)
Q2G "FDC638P" 6SOT23 338.9,79.3 r90 top (schematic designator Q2)
Q2H "FDC638P" 6SOT23 315.9,79.3 r90 top (schematic designator Q2)
Q2I "FDC638P" 6SOT23 292.9,79.3 r90 top (schematic designator Q2)
Q2J "FDC638P" 6SOT23 269.9,79.3 r90 top (schematic designator Q2)
Q2K "FDC638P" 6SOT23 246.9,79.3 r90 top (schematic designator Q2)
Q2L "FDC638P" 6SOT23 223.9,79.3 r90 top (schematic designator Q2)
Q2M "FDC638P" 6SOT23 200.9,79.3 r90 top (schematic designator Q2)
Q2N "FDC638P" 6SOT23 177.9,79.3 r90 top (schematic designator Q2)
Q2O "FDC638P" 6SOT23 154.9,79.3 r90 top (schematic designator Q2)
Q2P "FDC638P" 6SOT23 131.9,79.3 r90 top (schematic designator Q2)
Q4A "2SAR572D3TL1" TO-252-3 469.5,114.2 r90 top (schematic designator Q4)
Q4B "2SAR572D3TL1" TO-252-3 446.5,114.2 r90 top (schematic designator Q4)
Q4C "2SAR572D3TL1" TO-252-3 423.5,114.2 r90 top (schematic designator Q4)
Q4D "2SAR572D3TL1" TO-252-3 400.5,114.2 r90 top (schematic designator Q4)
Q4E "2SAR572D3TL1" TO-252-3 377.5,114.2 r90 top (schematic designator Q4)
Q4F "2SAR572D3TL1" TO-252-3 354.5,114.2 r90 top (schematic designator Q4)
Q4G "2SAR572D3TL1" TO-252-3 331.5,114.2 r90 top (schematic designator Q4)
Q4H "2SAR572D3TL1" TO-252-3 308.5,114.2 r90 top (schematic designator Q4)
Q4I "2SAR572D3TL1" TO-252-3 285.5,114.2 r90 top (schematic designator Q4)
Q4J "2SAR572D3TL1" TO-252-3 262.5,114.2 r90 top (schematic designator Q4)
Q4K "2SAR572D3TL1" TO-252-3 239.5,114.2 r90 top (schematic designator Q4)
Q4L "2SAR572D3TL1" TO-252-3 216.5,114.2 r90 top (schematic designator Q4)
Q4M "2SAR572D3TL1" TO-252-3 193.5,114.2 r90 top (schematic designator Q4)
Q4N "2SAR572D3TL1" TO-252-3 170.5,114.2 r90 top (schematic designator Q4)
Q4O "2SAR572D3TL1" TO-252-3 147.5,114.2 r90 top (schematic designator Q4)
Q4P "2SAR572D3TL1" TO-252-3 124.5,114.2 r90 top (schematic designator Q4)
R1 "FRC0402F2670TS" R0402 489.9,85.8 r90 top value=267
R2 "RTT029760FTH" R0402 491.5,85.8 r90 top value=976
R3 "CRCW040233R0FKED" R0402 486.5,99.6 r270 top value=33
R4 "CRCW040233R0FKED" R0402 493.1,85.8 r90 top value=33
R5 "0402WGF1003TCE" R0402 481.8,92.6 r180 top value=100k
R6 "CRCW040233R0FKED" R0402 516.1,121.6 r90 top value=33
R7 "ERJ2RKF1870X" R0402 490.7,85.8 r90 top value=187
R8 "FRC0402F4532TS" R0402 515.9,102.6 r0 top value=45.3k
R9 "CRCW04021R00FKEDC" R0402 520.2,99.5 r270 top value=1
R10 "0402WGF1002TCE" R0402 517.7,102.6 r0 top value=10k
R11 "CRCW04021R00FKEDC" R0402 487,104.2 r270 top value=1
R12A "0402WGF5101TCE" R0402 515.9,93.5 r180 top value=5.1k (schematic designator R12)
R12B "0402WGF5101TCE" R0402 515.9,78.5 r180 top value=5.1k (schematic designator R12)
R13A "0402WGF5101TCE" R0402 515.9,87.1 r180 top value=5.1k (schematic designator R13)
R13B "0402WGF5101TCE" R0402 515.9,72.1 r180 top value=5.1k (schematic designator R13)
R14A "0402WGF1002TCE" R0402 477.9,76.3 r270 top value=10k (schematic designator R14)
R14B "0402WGF1002TCE" R0402 454.9,76.3 r270 top value=10k (schematic designator R14)
R14C "0402WGF1002TCE" R0402 431.9,76.3 r270 top value=10k (schematic designator R14)
R14D "0402WGF1002TCE" R0402 408.9,76.3 r270 top value=10k (schematic designator R14)
R14E "0402WGF1002TCE" R0402 385.9,76.3 r270 top value=10k (schematic designator R14)
R14F "0402WGF1002TCE" R0402 362.9,76.3 r270 top value=10k (schematic designator R14)
R14G "0402WGF1002TCE" R0402 339.9,76.3 r270 top value=10k (schematic designator R14)
R14H "0402WGF1002TCE" R0402 316.9,76.3 r270 top value=10k (schematic designator R14)
R14I "0402WGF1002TCE" R0402 293.9,76.3 r270 top value=10k (schematic designator R14)
R14J "0402WGF1002TCE" R0402 270.9,76.3 r270 top value=10k (schematic designator R14)
R14K "0402WGF1002TCE" R0402 247.9,76.3 r270 top value=10k (schematic designator R14)
R14L "0402WGF1002TCE" R0402 224.9,76.3 r270 top value=10k (schematic designator R14)
R14M "0402WGF1002TCE" R0402 201.9,76.3 r270 top value=10k (schematic designator R14)
R14N "0402WGF1002TCE" R0402 178.9,76.3 r270 top value=10k (schematic designator R14)
R14O "0402WGF1002TCE" R0402 155.9,76.3 r270 top value=10k (schematic designator R14)
R14P "0402WGF1002TCE" R0402 132.9,76.3 r270 top value=10k (schematic designator R14)
R15 "0402WGF4702TCE" R0402 496.6,67.5 r270 top value=47k
R17A "ERA2AEB102X" R0402 476.6,99.6 r270 top value=1k (schematic designator R17)
R17B "ERA2AEB102X" R0402 453.6,99.6 r270 top value=1k (schematic designator R17)
R17C "ERA2AEB102X" R0402 430.6,99.6 r270 top value=1k (schematic designator R17)
R17D "ERA2AEB102X" R0402 407.6,99.6 r270 top value=1k (schematic designator R17)
R17E "ERA2AEB102X" R0402 384.6,99.6 r270 top value=1k (schematic designator R17)
R17F "ERA2AEB102X" R0402 361.6,99.6 r270 top value=1k (schematic designator R17)
R17G "ERA2AEB102X" R0402 338.6,99.6 r270 top value=1k (schematic designator R17)
R17H "ERA2AEB102X" R0402 315.6,99.6 r270 top value=1k (schematic designator R17)
R17I "ERA2AEB102X" R0402 292.6,99.6 r270 top value=1k (schematic designator R17)
R17J "ERA2AEB102X" R0402 269.6,99.6 r270 top value=1k (schematic designator R17)
R17K "ERA2AEB102X" R0402 246.6,99.6 r270 top value=1k (schematic designator R17)
R17L "ERA2AEB102X" R0402 223.6,99.6 r270 top value=1k (schematic designator R17)
R17M "ERA2AEB102X" R0402 200.6,99.6 r270 top value=1k (schematic designator R17)
R17N "ERA2AEB102X" R0402 177.6,99.6 r270 top value=1k (schematic designator R17)
R17O "ERA2AEB102X" R0402 154.6,99.6 r270 top value=1k (schematic designator R17)
R17P "ERA2AEB102X" R0402 131.6,99.6 r270 top value=1k (schematic designator R17)
R19A "ERA2AEB102X" R0402 476.6,97.6 r90 top value=1k (schematic designator R19)
R19B "ERA2AEB102X" R0402 453.6,97.6 r90 top value=1k (schematic designator R19)
R19C "ERA2AEB102X" R0402 430.6,97.6 r90 top value=1k (schematic designator R19)
R19D "ERA2AEB102X" R0402 407.6,97.6 r90 top value=1k (schematic designator R19)
R19E "ERA2AEB102X" R0402 384.6,97.6 r90 top value=1k (schematic designator R19)
R19F "ERA2AEB102X" R0402 361.6,97.6 r90 top value=1k (schematic designator R19)
R19G "ERA2AEB102X" R0402 338.6,97.6 r90 top value=1k (schematic designator R19)
R19H "ERA2AEB102X" R0402 315.6,97.6 r90 top value=1k (schematic designator R19)
R19I "ERA2AEB102X" R0402 292.6,97.6 r90 top value=1k (schematic designator R19)
R19J "ERA2AEB102X" R0402 269.6,97.6 r90 top value=1k (schematic designator R19)
R19K "ERA2AEB102X" R0402 246.6,97.6 r90 top value=1k (schematic designator R19)
R19L "ERA2AEB102X" R0402 223.6,97.6 r90 top value=1k (schematic designator R19)
R19M "ERA2AEB102X" R0402 200.6,97.6 r90 top value=1k (schematic designator R19)
R19N "ERA2AEB102X" R0402 177.6,97.6 r90 top value=1k (schematic designator R19)
R19O "ERA2AEB102X" R0402 154.6,97.6 r90 top value=1k (schematic designator R19)
R19P "ERA2AEB102X" R0402 131.6,97.6 r90 top value=1k (schematic designator R19)
R20 "AR05FTC1000" R0805 522,126.5 r270 top value=100
R21 "0402WGF1501TCE" R0402 482,79.7 r180 top value=1.5k
R22 "CRCW040233R0FKED" R0402 519,121.6 r90 top value=33
R24 "0402WGF1502TCE" R0402 481.8,93.4 r0 top value=15k
R25 "0402WGF1102TCE" R0402 498.1,76 r0 top value=11k
R26 "CRCW040233R0FKED" R0402 517.4,121.6 r90 top value=33
R27 "0402WGF1501TCE" R0402 498.1,75.1 r0 top value=1.5k
R28 "CRCW040233R0FKED" R0402 510.4,128.1 r0 top value=33
R29 "CRCW040233R0FKED" R0402 512.1,121.6 r90 top value=33
R30 "0402WGF1002TCE" R0402 493.6,102.8 r270 top value=10k
R31 "CRCW040233R0FKED" R0402 483.9,92 r0 top value=33
R32 "CRCW040233R0FKED" R0402 513.7,121.6 r90 top value=33
R33 "CRCW040233R0FKED" R0402 491.2,102.8 r270 top value=33
R34 "0402WGF1501TCE" R0402 485,81.8 r180 top value=1.5k
R35 "CRCW040233R0FKED" R0402 501,95.5 r180 top value=33
R36 "CRCW040233R0FKED" R0402 501,94.7 r180 top value=33
R37 "CRCW040233R0FKED" R0402 492.3,85.8 r90 top value=33
R38 "CRCW040233R0FKED" R0402 483.9,96.1 r0 top value=33
R39 "0402WGF1001TCE" R0402 489.9,128.5 r90 top value=1k
R40 "CRCW040233R0FKED" R0402 487.3,88.5 r0 top value=33
R41 "CRCW040233R0FKED" R0402 489.1,85.8 r90 top value=33
R42A "0402WGF220JTCE" R0402 477.4,101.5 r270 top value=22 (schematic designator R42)
R42B "0402WGF220JTCE" R0402 454.4,101.5 r270 top value=22 (schematic designator R42)
R42C "0402WGF220JTCE" R0402 431.4,101.5 r270 top value=22 (schematic designator R42)
R42D "0402WGF220JTCE" R0402 408.4,101.5 r270 top value=22 (schematic designator R42)
R42E "0402WGF220JTCE" R0402 385.4,101.5 r270 top value=22 (schematic designator R42)
R42F "0402WGF220JTCE" R0402 362.4,101.5 r270 top value=22 (schematic designator R42)
R42G "0402WGF220JTCE" R0402 339.4,101.5 r270 top value=22 (schematic designator R42)
R42H "0402WGF220JTCE" R0402 316.4,101.5 r270 top value=22 (schematic designator R42)
R42I "0402WGF220JTCE" R0402 293.4,101.5 r270 top value=22 (schematic designator R42)
R42J "0402WGF220JTCE" R0402 270.4,101.5 r270 top value=22 (schematic designator R42)
R42K "0402WGF220JTCE" R0402 247.4,101.5 r270 top value=22 (schematic designator R42)
R42L "0402WGF220JTCE" R0402 224.4,101.5 r270 top value=22 (schematic designator R42)
R42M "0402WGF220JTCE" R0402 201.4,101.5 r270 top value=22 (schematic designator R42)
R42N "0402WGF220JTCE" R0402 178.4,101.5 r270 top value=22 (schematic designator R42)
R42O "0402WGF220JTCE" R0402 155.4,101.5 r270 top value=22 (schematic designator R42)
R42P "0402WGF220JTCE" R0402 132.4,101.5 r270 top value=22 (schematic designator R42)
R44A "0402WGF1002TCE" R0402 476.2,91 r90 top value=10k (schematic designator R44)
R44B "0402WGF1002TCE" R0402 453.2,91 r90 top value=10k (schematic designator R44)
R44C "0402WGF1002TCE" R0402 430.2,91 r90 top value=10k (schematic designator R44)
R44D "0402WGF1002TCE" R0402 407.2,91 r90 top value=10k (schematic designator R44)
R44E "0402WGF1002TCE" R0402 384.2,91 r90 top value=10k (schematic designator R44)
R44F "0402WGF1002TCE" R0402 361.2,91 r90 top value=10k (schematic designator R44)
R44G "0402WGF1002TCE" R0402 338.2,91 r90 top value=10k (schematic designator R44)
R44H "0402WGF1002TCE" R0402 315.2,91 r90 top value=10k (schematic designator R44)
R44I "0402WGF1002TCE" R0402 292.2,91 r90 top value=10k (schematic designator R44)
R44J "0402WGF1002TCE" R0402 269.2,91 r90 top value=10k (schematic designator R44)
R44K "0402WGF1002TCE" R0402 246.2,91 r90 top value=10k (schematic designator R44)
R44L "0402WGF1002TCE" R0402 223.2,91 r90 top value=10k (schematic designator R44)
R44M "0402WGF1002TCE" R0402 200.2,91 r90 top value=10k (schematic designator R44)
R44N "0402WGF1002TCE" R0402 177.2,91 r90 top value=10k (schematic designator R44)
R44O "0402WGF1002TCE" R0402 154.2,91 r90 top value=10k (schematic designator R44)
R44P "0402WGF1002TCE" R0402 131.2,91 r90 top value=10k (schematic designator R44)
R45 "0402WGF1003TCE" R0402 498.8,69.2 r270 top value=100k
R46A "CRCW040233R0FKED" R0402 412.8,74.8 r90 top value=33 (schematic designator R46)
R46B "CRCW040233R0FKED" R0402 204.8,75.8 r90 top value=33 (schematic designator R46)
R49 "0402WGF1501TCE" R0402 481.9,83.7 r180 top value=1.5k
R50 "0402WGF4702TCE" R0402 514.4,94.4 r0 top value=47k
R51 "FRC0402F8202TS" R0402 512.6,94.4 r0 top value=82k
R52 "0402WGF1501TCE" R0402 487.8,100.7 r90 top value=1.5k
R53A "0402WGF1002TCE" R0402 475.6,101.5 r270 top value=10k (schematic designator R53)
R53B "0402WGF1002TCE" R0402 452.6,101.5 r270 top value=10k (schematic designator R53)
R53C "0402WGF1002TCE" R0402 429.6,101.5 r270 top value=10k (schematic designator R53)
R53D "0402WGF1002TCE" R0402 406.6,101.5 r270 top value=10k (schematic designator R53)
R53E "0402WGF1002TCE" R0402 383.6,101.5 r270 top value=10k (schematic designator R53)
R53F "0402WGF1002TCE" R0402 360.6,101.5 r270 top value=10k (schematic designator R53)
R53G "0402WGF1002TCE" R0402 337.6,101.5 r270 top value=10k (schematic designator R53)
R53H "0402WGF1002TCE" R0402 314.6,101.5 r270 top value=10k (schematic designator R53)
R53I "0402WGF1002TCE" R0402 291.6,101.5 r270 top value=10k (schematic designator R53)
R53J "0402WGF1002TCE" R0402 268.6,101.5 r270 top value=10k (schematic designator R53)
R53K "0402WGF1002TCE" R0402 245.6,101.5 r270 top value=10k (schematic designator R53)
R53L "0402WGF1002TCE" R0402 222.6,101.5 r270 top value=10k (schematic designator R53)
R53M "0402WGF1002TCE" R0402 199.6,101.5 r270 top value=10k (schematic designator R53)
R53N "0402WGF1002TCE" R0402 176.6,101.5 r270 top value=10k (schematic designator R53)
R53O "0402WGF1002TCE" R0402 153.6,101.5 r270 top value=10k (schematic designator R53)
R53P "0402WGF1002TCE" R0402 130.6,101.5 r270 top value=10k (schematic designator R53)
R54 "0402WGF1501TCE" R0402 485,77.7 r180 top value=1.5k
R55A "0402WGF220JTCE" R0402 473.8,101.5 r270 top value=22 (schematic designator R55)
R55B "0402WGF220JTCE" R0402 450.8,101.5 r270 top value=22 (schematic designator R55)
R55C "0402WGF220JTCE" R0402 427.8,101.5 r270 top value=22 (schematic designator R55)
R55D "0402WGF220JTCE" R0402 404.8,101.5 r270 top value=22 (schematic designator R55)
R55E "0402WGF220JTCE" R0402 381.8,101.5 r270 top value=22 (schematic designator R55)
R55F "0402WGF220JTCE" R0402 358.8,101.5 r270 top value=22 (schematic designator R55)
R55G "0402WGF220JTCE" R0402 335.8,101.5 r270 top value=22 (schematic designator R55)
R55H "0402WGF220JTCE" R0402 312.8,101.5 r270 top value=22 (schematic designator R55)
R55I "0402WGF220JTCE" R0402 289.8,101.5 r270 top value=22 (schematic designator R55)
R55J "0402WGF220JTCE" R0402 266.8,101.5 r270 top value=22 (schematic designator R55)
R55K "0402WGF220JTCE" R0402 243.8,101.5 r270 top value=22 (schematic designator R55)
R55L "0402WGF220JTCE" R0402 220.8,101.5 r270 top value=22 (schematic designator R55)
R55M "0402WGF220JTCE" R0402 197.8,101.5 r270 top value=22 (schematic designator R55)
R55N "0402WGF220JTCE" R0402 174.8,101.5 r270 top value=22 (schematic designator R55)
R55O "0402WGF220JTCE" R0402 151.8,101.5 r270 top value=22 (schematic designator R55)
R55P "0402WGF220JTCE" R0402 128.8,101.5 r270 top value=22 (schematic designator R55)
R56 "0402WGF4990TCE" R0402 489.7,118.5 r90 top value=499
R81 "CRCW040233R0FKED" R0402 486.4,112.2 r180 top value=33
R82 "CRCW040233R0FKED" R0402 488,109.6 r270 top value=33
R83 "0402WGF1002TCE" R0402 488.8,109.6 r90 top value=10k
R84 "CRCW04021R00FKEDC" R0402 492.5,110.5 r90 top value=1
R86 "RC0402FR-0712K1L" R0402 494.1,116.5 r0 top value=12.1k
R87 "0402WGF499JTCE" R0402 494.7,113.3 r180 top value=49.9
R88 "0402WGF499JTCE" R0402 494.7,114.9 r180 top value=49.9
R89 "0402WGF499JTCE" R0402 494.7,112.5 r180 top value=49.9
R90 "0402WGF499JTCE" R0402 494.7,114.1 r180 top value=49.9
R91 "CRCW040233R0FKED" R0402 486.4,113 r180 top value=33
R92 "CRCW040233R0FKED" R0402 486.4,114.8 r180 top value=33
R93 "CRCW040233R0FKED" R0402 486.4,115.6 r180 top value=33
R95 "0402WGF1002TCE" R0402 491.3,118.5 r90 top value=10k
R96 "0402WGF1001TCE" R0402 490.5,118.5 r270 top value=1k
R97 "0402WGF1001TCE" R0402 492.1,118.5 r270 top value=1k
R98 "0402WGF1002TCE" R0402 492.9,118.5 r90 top value=10k
S2 "TS-1092S-B3D2-G" SWITCH_TS-1092S-B3D2-G 497.8,128 r0 top
S3 "TS-1092S-B3D2-G" SWITCH_TS-1092S-B3D2-G 484.6,128 r180 top
TP1 "" TP_GRABBY 482,85 r0 top
TP2 "" TP_GRABBY 485,83 r0 top
TP4 "RH-5000" TP_RH-5000 470,66.2 r90 top
TP5 "RH-5001" TP_RH-5001 470,128.8 r90 top
TP6 "RH-5000" TP_RH-5000 447,128.8 r90 top
TP7 "RH-5001" TP_RH-5001 447,66 r90 top
TP8 "RH-5000" TP_RH-5000 424,66.2 r90 top
TP9 "RH-5001" TP_RH-5001 424,128.8 r90 top
TP10 "RH-5000" TP_RH-5000 401,128.8 r90 top
TP11 "RH-5001" TP_RH-5001 401,66.2 r90 top
TP12 "RH-5000" TP_RH-5000 378,66.2 r90 top
TP13 "RH-5001" TP_RH-5001 378,128.8 r90 top
TP14 "RH-5000" TP_RH-5000 355,128.8 r90 top
TP15 "RH-5001" TP_RH-5001 355,66.2 r90 top
TP16 "RH-5000" TP_RH-5000 332,66.2 r90 top
TP17 "RH-5001" TP_RH-5001 332,128.8 r90 top
TP18 "RH-5000" TP_RH-5000 309,128.8 r90 top
TP19 "RH-5001" TP_RH-5001 309,66.2 r90 top
TP20 "RH-5000" TP_RH-5000 286,66.2 r90 top
TP21 "RH-5001" TP_RH-5001 286,128.8 r90 top
TP22 "RH-5000" TP_RH-5000 263,128.8 r90 top
TP23 "RH-5001" TP_RH-5001 263,66.2 r90 top
TP24 "RH-5000" TP_RH-5000 240,66.2 r90 top
TP25 "RH-5001" TP_RH-5001 240,128.8 r90 top
TP26 "RH-5000" TP_RH-5000 217,128.8 r90 top
TP27 "RH-5001" TP_RH-5001 217,66.2 r90 top
TP28 "RH-5000" TP_RH-5000 194,66.2 r90 top
TP29 "RH-5001" TP_RH-5001 194,128.8 r90 top
TP30 "RH-5000" TP_RH-5000 171,128.8 r90 top
TP31 "RH-5001" TP_RH-5001 171,66.2 r90 top
TP32 "RH-5000" TP_RH-5000 148,66.2 r90 top
TP33 "RH-5000" TP_RH-5000 491,66 r90 top
TP34 "RH-5001" TP_RH-5001 148,128.8 r90 top
TP35 "RH-5000" TP_RH-5000 508,96 r90 top
TP36 "RH-5000" TP_RH-5000 125,128.8 r90 top
TP38 "RH-5001" TP_RH-5001 125,66.2 r90 top
TP39 "RH-5001" TP_RH-5001 521,97.2 r90 top
TP43 "RH-5001" TP_RH-5001 499,66 r90 top
TP62 "" TP_GRABBY 482,81 r0 top
TP63 "" TP_GRABBY 485,79 r180 top
U1 "STM32H563RGT6" 64TQFP10 492.45,94.35 r270 top
U2 "MT3406" 5SOT23 515.6,100.5 r0 top
U3A "TLV9051IDCKR" 5SC70 474,97.1 r90 top (schematic designator U3)
U3B "TLV9051IDCKR" 5SC70 451,97.1 r90 top (schematic designator U3)
U3C "TLV9051IDCKR" 5SC70 428,97.1 r90 top (schematic designator U3)
U3D "TLV9051IDCKR" 5SC70 405,97.1 r90 top (schematic designator U3)
U3E "TLV9051IDCKR" 5SC70 382,97.1 r90 top (schematic designator U3)
U3F "TLV9051IDCKR" 5SC70 359,97.1 r90 top (schematic designator U3)
U3G "TLV9051IDCKR" 5SC70 336,97.1 r90 top (schematic designator U3)
U3H "TLV9051IDCKR" 5SC70 313,97.1 r90 top (schematic designator U3)
U3I "TLV9051IDCKR" 5SC70 290,97.1 r90 top (schematic designator U3)
U3J "TLV9051IDCKR" 5SC70 267,97.1 r90 top (schematic designator U3)
U3K "TLV9051IDCKR" 5SC70 244,97.1 r90 top (schematic designator U3)
U3L "TLV9051IDCKR" 5SC70 221,97.1 r90 top (schematic designator U3)
U3M "TLV9051IDCKR" 5SC70 198,97.1 r90 top (schematic designator U3)
U3N "TLV9051IDCKR" 5SC70 175,97.1 r90 top (schematic designator U3)
U3O "TLV9051IDCKR" 5SC70 152,97.1 r90 top (schematic designator U3)
U3P "TLV9051IDCKR" 5SC70 129,97.1 r90 top (schematic designator U3)
U4A "CA-IS3741LB" 16SSOP635 468.652,92.4 r90 top (schematic designator U4)
U4B "CA-IS3741LB" 16SSOP635 445.652,92.4 r90 top (schematic designator U4)
U4C "CA-IS3741LB" 16SSOP635 422.652,92.4 r90 top (schematic designator U4)
U4D "CA-IS3741LB" 16SSOP635 399.653,92.4 r90 top (schematic designator U4)
U4E "CA-IS3741LB" 16SSOP635 376.653,92.4 r90 top (schematic designator U4)
U4F "CA-IS3741LB" 16SSOP635 353.652,92.4 r90 top (schematic designator U4)
U4G "CA-IS3741LB" 16SSOP635 330.652,92.4 r90 top (schematic designator U4)
U4H "CA-IS3741LB" 16SSOP635 307.652,92.4 r90 top (schematic designator U4)
U4I "CA-IS3741LB" 16SSOP635 284.652,92.4 r90 top (schematic designator U4)
U4J "CA-IS3741LB" 16SSOP635 261.652,92.4 r90 top (schematic designator U4)
U4K "CA-IS3741LB" 16SSOP635 238.652,92.4 r90 top (schematic designator U4)
U4L "CA-IS3741LB" 16SSOP635 215.652,92.4 r90 top (schematic designator U4)
U4M "CA-IS3741LB" 16SSOP635 192.653,92.4 r90 top (schematic designator U4)
U4N "CA-IS3741LB" 16SSOP635 169.653,92.4 r90 top (schematic designator U4)
U4O "CA-IS3741LB" 16SSOP635 146.652,92.4 r90 top (schematic designator U4)
U4P "CA-IS3741LB" 16SSOP635 123.652,92.4 r90 top (schematic designator U4)
U5A "DAC80501ZDGSR" TI_DGS 467.647,99.275 r180 top (schematic designator U5)
U5B "DAC80501ZDGSR" TI_DGS 444.647,99.275 r180 top (schematic designator U5)
U5C "DAC80501ZDGSR" TI_DGS 421.647,99.275 r180 top (schematic designator U5)
U5D "DAC80501ZDGSR" TI_DGS 398.647,99.275 r180 top (schematic designator U5)
U5E "DAC80501ZDGSR" TI_DGS 375.647,99.275 r180 top (schematic designator U5)
U5F "DAC80501ZDGSR" TI_DGS 352.647,99.275 r180 top (schematic designator U5)
U5G "DAC80501ZDGSR" TI_DGS 329.647,99.275 r180 top (schematic designator U5)
U5H "DAC80501ZDGSR" TI_DGS 306.647,99.275 r180 top (schematic designator U5)
U5I "DAC80501ZDGSR" TI_DGS 283.647,99.275 r180 top (schematic designator U5)
U5J "DAC80501ZDGSR" TI_DGS 260.647,99.275 r180 top (schematic designator U5)
U5K "DAC80501ZDGSR" TI_DGS 237.647,99.275 r180 top (schematic designator U5)
U5L "DAC80501ZDGSR" TI_DGS 214.647,99.275 r180 top (schematic designator U5)
U5M "DAC80501ZDGSR" TI_DGS 191.647,99.275 r180 top (schematic designator U5)
U5N "DAC80501ZDGSR" TI_DGS 168.647,99.275 r180 top (schematic designator U5)
U5O "DAC80501ZDGSR" TI_DGS 145.647,99.275 r180 top (schematic designator U5)
U5P "DAC80501ZDGSR" TI_DGS 122.647,99.275 r180 top (schematic designator U5)
U6A "DC21-V0505SLF" HALO_DC21 468.5,81.7 r180 top (schematic designator U6)
U6B "DC21-V0505SLF" HALO_DC21 445.5,81.7 r180 top (schematic designator U6)
U6C "DC21-V0505SLF" HALO_DC21 422.5,81.7 r180 top (schematic designator U6)
U6D "DC21-V0505SLF" HALO_DC21 399.5,81.7 r180 top (schematic designator U6)
U6E "DC21-V0505SLF" HALO_DC21 376.5,81.7 r180 top (schematic designator U6)
U6F "DC21-V0505SLF" HALO_DC21 353.5,81.7 r180 top (schematic designator U6)
U6G "DC21-V0505SLF" HALO_DC21 330.5,81.7 r180 top (schematic designator U6)
U6H "DC21-V0505SLF" HALO_DC21 307.5,81.7 r180 top (schematic designator U6)
U6I "DC21-V0505SLF" HALO_DC21 284.5,81.7 r180 top (schematic designator U6)
U6J "DC21-V0505SLF" HALO_DC21 261.5,81.7 r180 top (schematic designator U6)
U6K "DC21-V0505SLF" HALO_DC21 238.5,81.7 r180 top (schematic designator U6)
U6L "DC21-V0505SLF" HALO_DC21 215.5,81.7 r180 top (schematic designator U6)
U6M "DC21-V0505SLF" HALO_DC21 192.5,81.7 r180 top (schematic designator U6)
U6N "DC21-V0505SLF" HALO_DC21 169.5,81.7 r180 top (schematic designator U6)
U6O "DC21-V0505SLF" HALO_DC21 146.5,81.7 r180 top (schematic designator U6)
U6P "DC21-V0505SLF" HALO_DC21 123.5,81.7 r180 top (schematic designator U6)
U7 "LAN8742AI-CZ-TR" 24QFN4E 489.9,113.7 r270 top
U8 "TPS51386RJNR" TI_RJN 497.2,72.5 r180 top
U9A "PCAL9535APW,118" 24TSSOP65 412.9,69.5 r180 top (schematic designator U9)
U9B "PCAL9535APW,118" 24TSSOP65 205.3,69.5 r180 top (schematic designator U9)
X1 "XRCGB16M000FXN00R0" 4_SMD_2.0X1.6MM 494.4,106.6 r0 top